# Allegro board FPMemory.brd
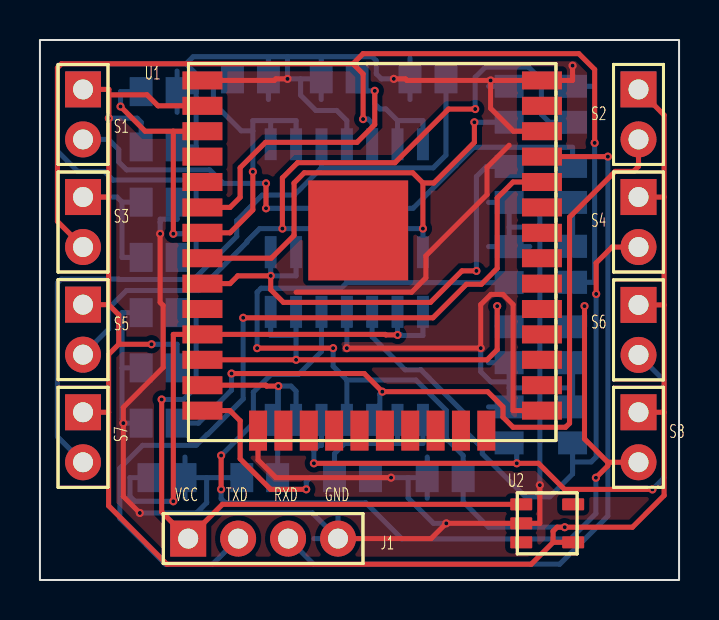
[diagram p0: board, top side]
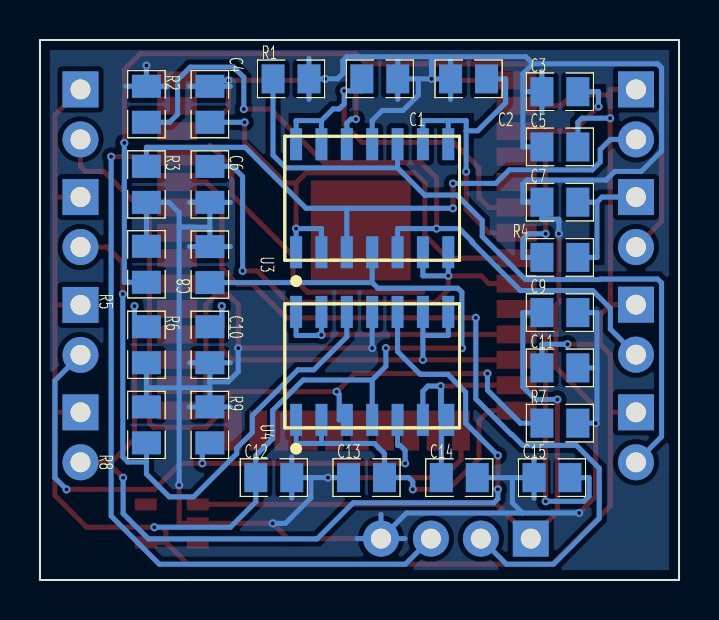
[diagram p1: board, bottom side, seen from below]

Outline 32 x 27 mm; copper layers: TOP, BOTTOM. Coordinates in mm from the lower left corner of the outline.
Outline path: rectangle 0,0 32,27

## Design rules (mm)
constraint set DEFAULT: min track width 0.254, pair gap 0.254

## Placement (name value [footprint] x y rotation side)
C1  0.1uF  [CAP0805]  14.98 25.06 0 bottom
C2  0.1uF  [CAP0805]  10.54 25.06 0 bottom
C3  0.1uF  [CAP0805]  5.97 24.42 180 bottom
C4  0.1uF  [CAP0805]  23.49 23.79 270 bottom
C5  10uF  [CAP0805]  5.97 21.65 180 bottom
C6  0.1uF  [CAP0805]  23.49 19.78 270 bottom
C7  0.1uF  [CAP0805]  5.97 18.89 180 bottom
C8  0.1uF  [CAP0805]  23.49 15.77 90 bottom
C9  1uF  [CAP0805]  5.97 13.37 180 bottom
C10  0.1uF  [CAP0805]  23.49 11.76 270 bottom
C11  2.2uF  [CAP0805]  5.97 10.61 180 bottom
C12  0.1uF  [CAP0805]  20.29 5.12 180 bottom
C13  0.1uF  [CAP0805]  15.65 5.12 180 bottom
C14  0.1uF  [CAP0805]  11 5.12 180 bottom
C15  0.1uF  [CAP0805]  6.36 5.12 180 bottom
J1  UART  [SIP-4]  7.42 2.07 90 top
R1  50k  [RES0805]  19.43 25.06 180 bottom
R2  50k  [RES0805]  26.67 23.79 270 bottom
R3  50k  [RES0805]  26.67 19.78 270 bottom
R4  10k  [RES0805]  5.97 16.13 180 bottom
R5  50k  [RES0805]  26.67 15.79 90 bottom
R6  50k  [RES0805]  26.67 11.76 270 bottom
R7  50k  [RES0805]  5.97 7.84 180 bottom
R8  50k  [RES0805]  26.67 7.75 90 bottom
R9  50k  [RES0805]  23.49 7.75 270 bottom
S1  IMS-C20B  [SIP-2]  2.16 24.53 0 top
S2  IMS-C20B  [SIP-2]  29.97 24.53 0 top
S3  IMS-C20B  [SIP-2]  2.16 19.15 0 top
S4  IMS-C20B  [SIP-2]  29.97 19.15 0 top
S5  IMS-C20B  [SIP-2]  2.16 13.77 0 top
S6  IMS-C20B  [SIP-2]  29.97 13.75 0 top
S7  IMS-C20B  [SIP-2]  2.16 8.39 0 top
S8  IMS-C20B  [SIP-2]  29.97 8.39 0 top
U1  ESP32  [SMD-38]  16.63 19.47 0 top
U2  TPS70933  [SOT-23]  25.4 2.83 0 top
U3  LM324  [SOIC-14]  15.36 19.09 90 bottom
U4  LM324  [SOIC-14]  15.36 10.71 90 bottom

## Library data of the parts
C1-C15 = CAP NP
J1 = UART_1
R1-R9 = R
S1-S8 = IMS-C20B_1
U1 = ESP32_1
U2 = TPS70933
U3 U4 = LM324

## Footprints (pads in the part's own frame, mm; a bottom-side part is the same pattern mirrored in y, then rotated)
CAP0805
  rect 1.15x1.45 smd: 1(-0.9,0) 2(0.9,0)
RES0805
  rect 1.15x1.45 smd: 1(-0.9,0) 2(0.9,0)
SIP-2
  rect 1.8x1.8 hole 1: 1(0,0)
  round 1.8 hole 1: 2(0,-2.5)
SIP-4
  rect 1.8x1.8 hole 1: 1(0,0)
  round 1.8 hole 1: 3(0,-2.5) 4(0,-5) 5(0,-7.5)
SMD-38
  rect 5x5 smd: (-0.7,-1.99)
  rect 2x0.9 smd: 1(-8.5,5.51) 2(-8.5,4.24) 3(-8.5,2.97) 4(-8.5,1.7) 5(-8.5,0.43) 6(-8.5,-0.84) 7(-8.5,-2.11) 8(-8.5,-3.38) 9(-8.5,-4.65) 10(-8.5,-5.92) 11(-8.5,-7.19) 12(-8.5,-8.46) 13(-8.5,-9.73) 14(-8.5,-11) 25(8.5,-11) 26(8.5,-9.73) 27(8.5,-8.46) 28(8.5,-7.19) 29(8.5,-5.92) 30(8.5,-4.65) 31(8.5,-3.38) 32(8.5,-2.11) 33(8.5,-0.84) 34(8.5,0.43) 35(8.5,1.7) 36(8.5,2.97) 37(8.5,4.24) 38(8.5,5.51)
  rect 0.9x2 smd: 15(-5.715,-12) 16(-4.445,-12) 17(-3.175,-12) 18(-1.905,-12) 19(-0.635,-12) 20(0.635,-12) 21(1.905,-12) 22(3.175,-12) 23(4.445,-12) 24(5.715,-12)
SOIC-14
  rect 1.6x0.6 smd: 1(-2.7,3.81) 2(-2.7,2.54) 3(-2.7,1.27) 4(-2.7,0) 5(-2.7,-1.27) 6(-2.7,-2.54) 7(-2.7,-3.81) 8(2.7,-3.81) 9(2.7,-2.54) 10(2.7,-1.27) 11(2.7,0) 12(2.7,1.27) 13(2.7,2.54) 14(2.7,3.81)
SOT-23
  rrect 1.1x0.6 smd: 1(-1.3,0.95) 2(-1.3,0) 3(-1.3,-0.95) 4(1.3,-0.95) 5(1.3,0.95)

## Nets
GND: C1.1 C2.2 C3.1 C4.1 C5.1 C6.2 C7.1 C8.2 C9.2 C10.2 C11.2 C12.2 C13.1 C14.2 C15.1 J1.5 R1.2 R2.1 R3.2 R5.2 R6.2 R7.2 R8.2 R9.1 U1.1 U1.15 U1.25 U1.36 U1.38 U2.2 U3.11 U4.11
VCC: C9.1 J1.1 U2.1
VDD33: C5.2 C7.2 C8.1 C11.1 C12.1 R4.2 S1.1 S2.1 S3.1 S4.1 S5.1 S6.1 S7.1 S8.1 U1.2 U2.4(OUT) U3.4(VCC) U4.4(VCC)
ADC1_CH4: C4.2 U1.8 U3.1 U3.2
ADC1_CH5: C6.1 U1.9 U3.6 U3.7
ADC1_CH6: C1.2 U1.6 U3.13 U3.14
ADC1_CH7: C2.1 U1.7 U3.8 U3.9
ADC2_CH5: C13.2 U1.14 U4.1 U4.2
ADC2_CH6: C14.1 U1.13 U4.6 U4.7
ADC2_CH7: C10.1 U1.12 U4.8 U4.9
ADC2_CH9: C15.2 U1.11 U4.13 U4.14
RXD: J1.4 U1.35(TXD0)
TXD: J1.3(TXD) U1.34
N01133: R3.1 S1.2(-) U3.3
N02072: R2.2 S5.2(-) U3.5
N02980: R5.1 S3.2(-) U3.12
N03024: R1.1 S7.2(-) U3.10
N05883: C3.2 R4.1 U1.3
N44841: R7.1 S2.2(-) U4.3
N44913: R8.1 S4.2(-) U4.12
N45127: R9.2 S6.2(-) U4.5
N45143: R6.1 S8.2(-) U4.10

Pads without a net: U1 4 5 10 16 17 18 19 20 21 22 23 24 26 27 28 29 30 31 32 33 37; U2 3 5

## Via types
v1: diameter 0.406, hole 0.203, TOP to BOTTOM, 50 vias

## Routing (per net, layer and track width the routed paths; a pad name or vN(x,y) marks a point on that pad's centre or on a via; arc(x,y) is an arc through that point)
GND: length 231.1
  TOP w0.254: v1(22.56,24.98) 18.38,24.98 18.3,25.06 v1(17.72,25.06) ; v1(22.56,24.98) U1.38 26.67,24.98 v1(26.67,25.72) ; v1(22.56,24.98) 22.56,23.58 23.71,22.44 U1.36 ; v1(25.03,4.74) 25.03,2.83 U2.2 v1(20.35,2.83) 19.58,2.07 J1.5 ; v1(15.36,11.59) v1(22.07,11.59) 22.07,13.77 22.58,14.28 23.18,14.28 23.69,13.77 23.69,8.47 U1.25 ; U1.15 10.92,6.01 11.81,5.12 v1(17.58,5.12) ; v1(6.02,17.31) 6.02,13.88 6.17,13.73 6.17,10.63 4.18,8.63 v1(4.18,7.84) 4.18,4.18 v1(5,3.35) ; 12.82,14.39 18.61,14.39 19.32,15.11 19.32,16.21 22.39,19.27 22.39,20.63 23.49,21.74 ; v1(12.39,25.06) 11.81,25.06 11.73,24.98 U1.1
  BOTTOM w0.254: v1(25.03,4.74) 25.03,9.61 ; 25.03,9.61 26.67,9.61 ; 25.03,9.61 25.03,17.64 ; 25.03,9.61 23.49,9.61 ; 4.11,10.61 4.11,13.37 C9.2 ; 4.11,10.61 4.11,8.05 4.18,7.98 v1(4.18,7.84) R7.2 ; 4.11,10.61 C11.2 ; 7.82,24.42 7.82,25.3 7.31,25.81 ; 7.82,24.42 7.82,21.65 C5.1 ; 7.82,24.42 C3.1 ; 22.46,18.88 C6.2 ; C6.2 23.49,17.64 ; C6.2 24.52,18.88 ; C10.2 23.49,9.91 ; C10.2 22.46,10.86 ; C10.2 24.52,10.86 ; 23.49,9.91 22.58,9.91 22.07,10.41 v1(22.07,11.59) ; 23.49,9.91 23.49,9.61 ; 26.67,9.61 R8.2 ; 26.67,9.61 R6.2 ; 13.05,25.06 13.05,24.24 13.81,23.48 14.86,23.48 15.36,22.97 15.36,21.79 ; 13.05,25.06 v1(12.39,25.06) ; 13.05,25.06 C1.1 ; C3.1 6.87,25.45 ; C3.1 6.87,23.39 ; C4.1 24.52,24.69 ; C4.1 22.46,24.69 ; C4.1 23.49,24.98 v1(22.56,24.98) ; C2.2 v1(12.39,25.06) ; C2.2 11.44,26.09 ; C2.2 11.44,24.03 ; v1(12.39,25.06) 12.39,26.16 ; 23.49,17.64 C8.2 ; 23.49,17.64 25.03,17.64 ; R9.1 24.52,8.65 ; R9.1 22.46,8.65 ; R9.1 23.49,9.61 ; 14.08,24.03 C1.1 ; C1.1 14.08,26.09 ; 7.26,4.09 C15.1 ; C15.1 7.26,6.15 ; C15.1 8.35,5.12 ; 8.35,5.12 8.35,3.86 7.84,3.35 ; 8.35,5.12 C14.2 ; 19.39,4.09 C12.2 ; C12.2 18.43,5.12 ; C12.2 19.39,6.15 ; 12.39,26.16 16.64,26.16 16.84,25.96 16.84,25.31 17.09,25.06 v1(17.72,25.06) R1.2 ; 12.39,26.16 7.67,26.16 7.31,25.81 ; 7.31,25.81 1.07,25.81 0.88,25.61 0.88,21.45 1.89,20.43 3.22,20.43 3.65,20 7.62,20 7.82,19.8 7.82,18.89 C7.1 6.87,18.04 6.02,18.04 6.02,17.9 6.02,17.9 v1(6.02,17.31) ; R2.1 v1(26.67,25.72) ; R2.1 27.7,24.69 ; R2.1 25.64,24.69 ; 7.84,3.35 13.64,3.35 J1.5 ; 7.84,3.35 v1(5,3.35) ; 15.36,13.41 v1(15.36,11.59) ; 25.03,17.64 25.03,18.37 25.54,18.88 R3.2 R5.2 ; J1.5 16.13,2.07 ; J1.5 13.72,2.07 ; J1.5 14.92,3.28 ; 22.46,16.67 C8.2 ; C8.2 24.52,16.67 ; 18.43,5.12 18.43,4.1 19.7,2.83 v1(20.35,2.83) ; 18.43,5.12 v1(17.58,5.12) C13.1 ; R1.2 18.53,26.09 ; R1.2 18.53,24.03
VCC: length 31.5
  TOP w0.254: U2.1 9.14,3.78 J1.1 6.09,3.4 v1(6.09,9.03)
  BOTTOM w0.254: v1(6.09,9.03) 7.19,9.03 7.82,9.66 7.82,13.37 C9.1
VDD33: length 142.5
  TOP w0.254: 3.45,24.26 5.36,24.26 5.91,23.71 U1.2 ; 3.45,24.26 3.45,24.53 S1.1 ; 3.45,24.26 v1(3.45,23.09) 3.45,19.16 3.44,19.15 ; S6.1 31.25,13.75 ; 31.25,13.75 31.25,8.39 ; 31.25,13.75 31.25,19.15 ; S2.1 31.25,23.25 31.25,19.15 ; S4.1 31.25,19.15 ; S8.1 31.25,8.39 ; 31.25,8.39 31.25,4.23 29.66,2.64 v1(26.28,2.64) 25.89,2.64 25.69,2.44 25.69,1.88 ; 3.95,11.79 3.44,11.28 3.44,8.39 ; 3.95,11.79 3.95,13.26 3.44,13.77 ; 3.95,11.79 v1(5.59,11.79) ; 3.44,8.39 3.44,3.71 6.36,0.79 24.6,0.79 25.69,1.88 ; 3.44,8.39 S7.1 ; v1(14.68,11.59) v1(10.87,11.59) ; 3.44,13.77 S5.1 ; 3.44,13.77 3.44,19.15 ; 3.44,19.15 S3.1 ; U2.4 25.69,1.88
  BOTTOM w0.254: C5.2 5.07,22.89 4.87,23.09 v1(3.45,23.09) ; v1(26.28,2.64) 22.46,2.64 21.19,3.91 C12.1 21.19,6.22 20.35,7.07 20.35,8.48 18.82,10 15.36,10 ; v1(14.68,11.59) 14.68,10.69 15.36,10 ; 15.36,10 U4.4 ; U3.4 15.36,14.87 ; 15.36,14.87 15.08,14.59 11.07,14.59 10.87,14.39 v1(10.87,11.59) ; 15.36,14.87 C8.1 ; S3.1 3.85,19.15 4.11,18.89 ; 4.11,18.89 4.11,16.13 R4.2 ; 4.11,18.89 C7.2 ; v1(5.59,11.79) 6.87,11.79 C11.1
ADC1_CH4: length 26.6
  TOP w0.254: U1.8 11.58,16.09 12.72,17.23 12.72,19.85 13.23,20.36 18.67,20.36 19.17,19.85 ; 19.17,19.85 19.72,19.85 21.75,21.88 v1(21.75,22.89) ; 19.17,19.85 v1(19.17,17.57)
  BOTTOM w0.254: U3.1 v1(19.17,17.57) 17.9,17.57 U3.2 ; C4.2 v1(21.75,22.89)
ADC1_CH5: length 25.7
  TOP w0.254: U1.9 9.52,14.82 9.9,15.21 v1(11.55,15.21) 11.55,14.52 12.19,13.88 19.55,13.88 21.13,15.46 v1(21.85,15.46)
  BOTTOM w0.254: U3.7 v1(11.55,15.21) 12.82,15.21 U3.6 ; C6.1 22.36,20.68 21.85,20.17 v1(21.85,15.46)
ADC1_CH6: length 20.1
  TOP w0.254: U1.6 9.52,18.63 10.02,19.14 10.02,20.61 11.29,21.88 15.87,21.88 16.76,22.77 v1(16.76,24.46)
  BOTTOM w0.254: 17.9,22.97 17.32,23.55 17.02,23.55 16.76,23.81 v1(16.76,24.46) 15.88,24.46 C1.2 ; 17.9,22.97 17.9,21.79 ; 17.9,22.97 19.17,22.97 U3.14
ADC1_CH7: length 16.7
  TOP w0.254: U1.7 9.52,17.36 10.66,18.5 v1(10.66,20.41)
  BOTTOM w0.254: 11.55,22.97 12.82,22.97 U3.9 ; 11.55,22.97 10.66,22.97 10.66,22.46 ; 11.55,22.97 U3.8 ; v1(10.66,20.41) 10.66,22.46 ; 10.66,22.46 10.08,22.46 8.68,23.86 8.68,25.06 C2.1
ADC2_CH5: length 18
  TOP w0.254: v1(13.33,4.53) 11.55,4.53 10.02,6.06 10.02,7.96 9.52,8.47 U1.14
  BOTTOM w0.254: 17.9,6.83 19.17,6.83 U4.1 ; 17.9,6.83 15.26,6.83 14.75,6.32 C13.2 13.54,5.12 13.33,4.91 v1(13.33,4.53) ; 17.9,6.83 U4.2
ADC2_CH6: length 12.9
  TOP w0.254: v1(11.94,9.7) 11.35,9.7 11.31,9.74 U1.13
  BOTTOM w0.254: U4.7 11.94,8.01 v1(11.94,9.7) ; v1(11.94,9.7) 11.9,9.66 C14.1 ; v1(11.94,9.7) 12.57,9.7 12.82,9.44 U4.6
ADC2_CH7: length 23.6
  TOP w0.254: v1(22.9,13.69) 22.9,11.52 22.39,11.01 v1(12.82,11.01) U1.12
  BOTTOM w0.254: v1(22.9,13.69) 22.9,12.66 C10.1 ; 12.82,12.23 11.55,12.23 U4.8 ; 12.82,12.23 v1(12.82,11.01) ; 12.82,12.23 U4.9
ADC2_CH9: length 27.4
  TOP w0.254: v1(6.68,3.94) 6.68,12.28 U1.11 17.3,12.28 17.32,12.25 v1(17.9,12.25)
  BOTTOM w0.254: v1(6.68,3.94) 4.76,3.94 4.51,4.19 4.51,5.12 C15.2 ; 17.9,13.41 v1(17.9,12.25) 18.08,12.25 18.11,12.23 19.17,12.23 U4.14
RXD: length 38.8
  TOP w0.254: U1.35 v1(28.43,21.17)
  BOTTOM w0.254: J1.4 13.71,0.79 26.02,0.79 28.43,3.2 v1(28.43,21.17)
TXD: length 41.4
  TOP w0.254: v1(10.18,13.11) 19.68,13.11 21.36,14.79 22.1,14.79 22.89,15.58 22.89,19.11 23.69,19.9 U1.34
  BOTTOM w0.254: v1(10.18,13.11) 10.18,9.05 8.4,7.28 8.37,7.28 7.82,6.73 5.14,6.73 4,5.59 4,3.07 6.28,0.79 8.64,0.79 J1.3
N01133: length 31.4
  TOP w0.254: v1(11.32,18.59) v1(11.32,19.83)
  BOTTOM w0.254: 16.63,16.39 16.63,18.59 ; 16.63,18.59 v1(11.32,18.59) ; 16.63,18.59 18.68,18.59 20.84,20.74 20.84,20.75 21.73,21.63 26.67,21.63 R3.1 ; S1.2 3.44,22.03 3.95,21.52 3.95,20.9 4.34,20.51 8.5,20.51 9.18,19.83 v1(11.32,19.83)
N02072: length 38.8
  TOP w0.254: v1(21.79,23.55) 20.46,23.55 17.78,20.87 12.9,20.87 12.14,20.11 v1(12.14,17.57)
  BOTTOM w0.254: v1(21.79,23.55) 21.79,25.14 22.3,25.64 24.47,25.64 25.11,25.01 25.11,23.28 25.5,22.89 R2.2 ; 14.09,16.39 14.09,17.57 v1(12.14,17.57) 11,17.57 10.36,16.93 10.36,16.89 7.95,14.47 4.33,14.47 3.44,13.58 3.44,12.55 S5.2
N02980: length 53.3
  TOP w0.254: v1(27.77,21.85) 27.77,25.52 26.98,26.32 16.18,26.32 15.67,25.81 ; 15.67,25.81 16.18,25.3 v1(16.18,23.05) ; 15.67,25.81 1.07,25.81 0.88,25.61 0.88,17.93 S3.2
  BOTTOM w0.254: v1(16.18,23.05) 16.43,23.05 16.63,22.84 U3.12 ; v1(27.77,21.85) 27.77,14.89 R5.1
N03024: length 37.1
  BOTTOM w0.254: U3.10 14.09,20.61 ; 14.09,20.61 19.69,20.61 20.33,21.24 R1.1 ; 14.09,20.61 12.73,19.25 11.12,19.25 9.85,17.98 9.85,17.18 7.7,15.02 3.96,15.02 3.93,15.05 1.07,15.05 0.88,14.85 0.88,7.17 S7.2
N05883: length 14.6
  TOP w0.254: 6.68,22.44 5.27,22.44 v1(4.03,23.67) ; 6.68,22.44 v1(6.68,17.31) ; 6.68,22.44 U1.3
  BOTTOM w0.254: v1(6.68,17.31) 7.57,17.31 7.82,17.06 7.82,16.13 R4.1 ; C3.2 4.03,24.42 v1(4.03,23.67)
N44841: length 40.7
  TOP w0.254: S2.2 29.97,20.68 29.72,20.43 28.8,20.43 26.52,18.14 26.52,7.84 26.32,7.64 23.69,7.64 23.18,8.15 23.18,8.65 22.42,9.42 v1(17.14,9.42) 16.24,10.32 v1(9.59,10.32)
  BOTTOM w0.254: v1(9.59,10.32) 9.59,9.49 7.94,7.84 R7.1 ; 16.63,8.01 17.02,8.01 17.02,9.29 v1(17.14,9.42)
N44913: length 30.7
  TOP w0.254: S4.2 28.64,16.65 27.85,15.85 v1(27.85,14.3)
  BOTTOM w0.254: v1(27.85,14.3) 27.85,6.15 27.6,5.9 26.67,5.9 ; R8.1 26.67,5.9 ; 26.67,5.9 26.67,5.3 25.52,4.16 24.31,4.16 22.15,6.32 22.15,6.59 21.36,7.38 21.36,8.22 19.08,10.51 18.29,10.51 16.63,12.16 U4.12
N45127: length 28.8
  TOP w0.254: v1(13.72,5.83) v1(23.87,5.83) 24.96,5.83 26.27,4.53 v1(30.67,4.53)
  BOTTOM w0.254: v1(30.67,4.53) 31.25,5.11 31.25,9.97 S6.2 ; 14.09,8.01 14.09,6.73 13.97,6.73 13.72,6.48 v1(13.72,5.83) ; R9.2 23.87,6.85 v1(23.87,5.83)
N45143: length 46.6
  TOP w0.254: v1(27.84,5.11) 28.43,5.71 28.43,5.89 ; v1(27.27,13.69) 27.27,7.05 28.43,5.89 ; S8.2 28.43,5.89 ; v1(9.07,6.22) v1(9.07,4.53)
  BOTTOM w0.254: U4.10 14.09,11.42 12.95,10.28 11.57,10.28 10.68,9.39 10.68,7.84 v1(9.07,6.22) ; v1(27.84,5.11) 27.84,3.33 26.57,2.06 18.12,2.06 16.32,3.86 9.28,3.86 9.07,4.06 v1(9.07,4.53) ; v1(27.27,13.69) 27.27,12.66 R6.1

## Copper pours and planes (outline as drawn; the poured copper is in the pictures)
GND on TOP: 0.5,26.5 31.5,26.5 31.5,0.5 0.5,0.5 ; 20 cut-outs
GND on BOTTOM: 0.5,26.5 31.5,26.5 31.5,0.5 0.5,0.5 ; 18 cut-outs

## Text on the board
Ref Des/Silkscreen Top: VCC | TXD | RXD | GND
NCLEGEND-1-2: FIGURE | FINISHED_SIZE | 39.37 | 8.0 | DRILL CHART: TOP to BOTTOM | ALL UNITS ARE IN MILS | PLATED | QTY | 20 | 50
